# Altium PCB RelèBluetooth.PcbDoc
Units mil, origin at the board's own origin, x right, y up, seen from the top; angles counter-clockwise.
Board outline 2005 x 2655 mil, 2 copper layers (Top Layer, Bottom Layer); 26 components, 24 nets, 87 pads, 1 vias.
Unrouted connection lines stored in the file: 3.
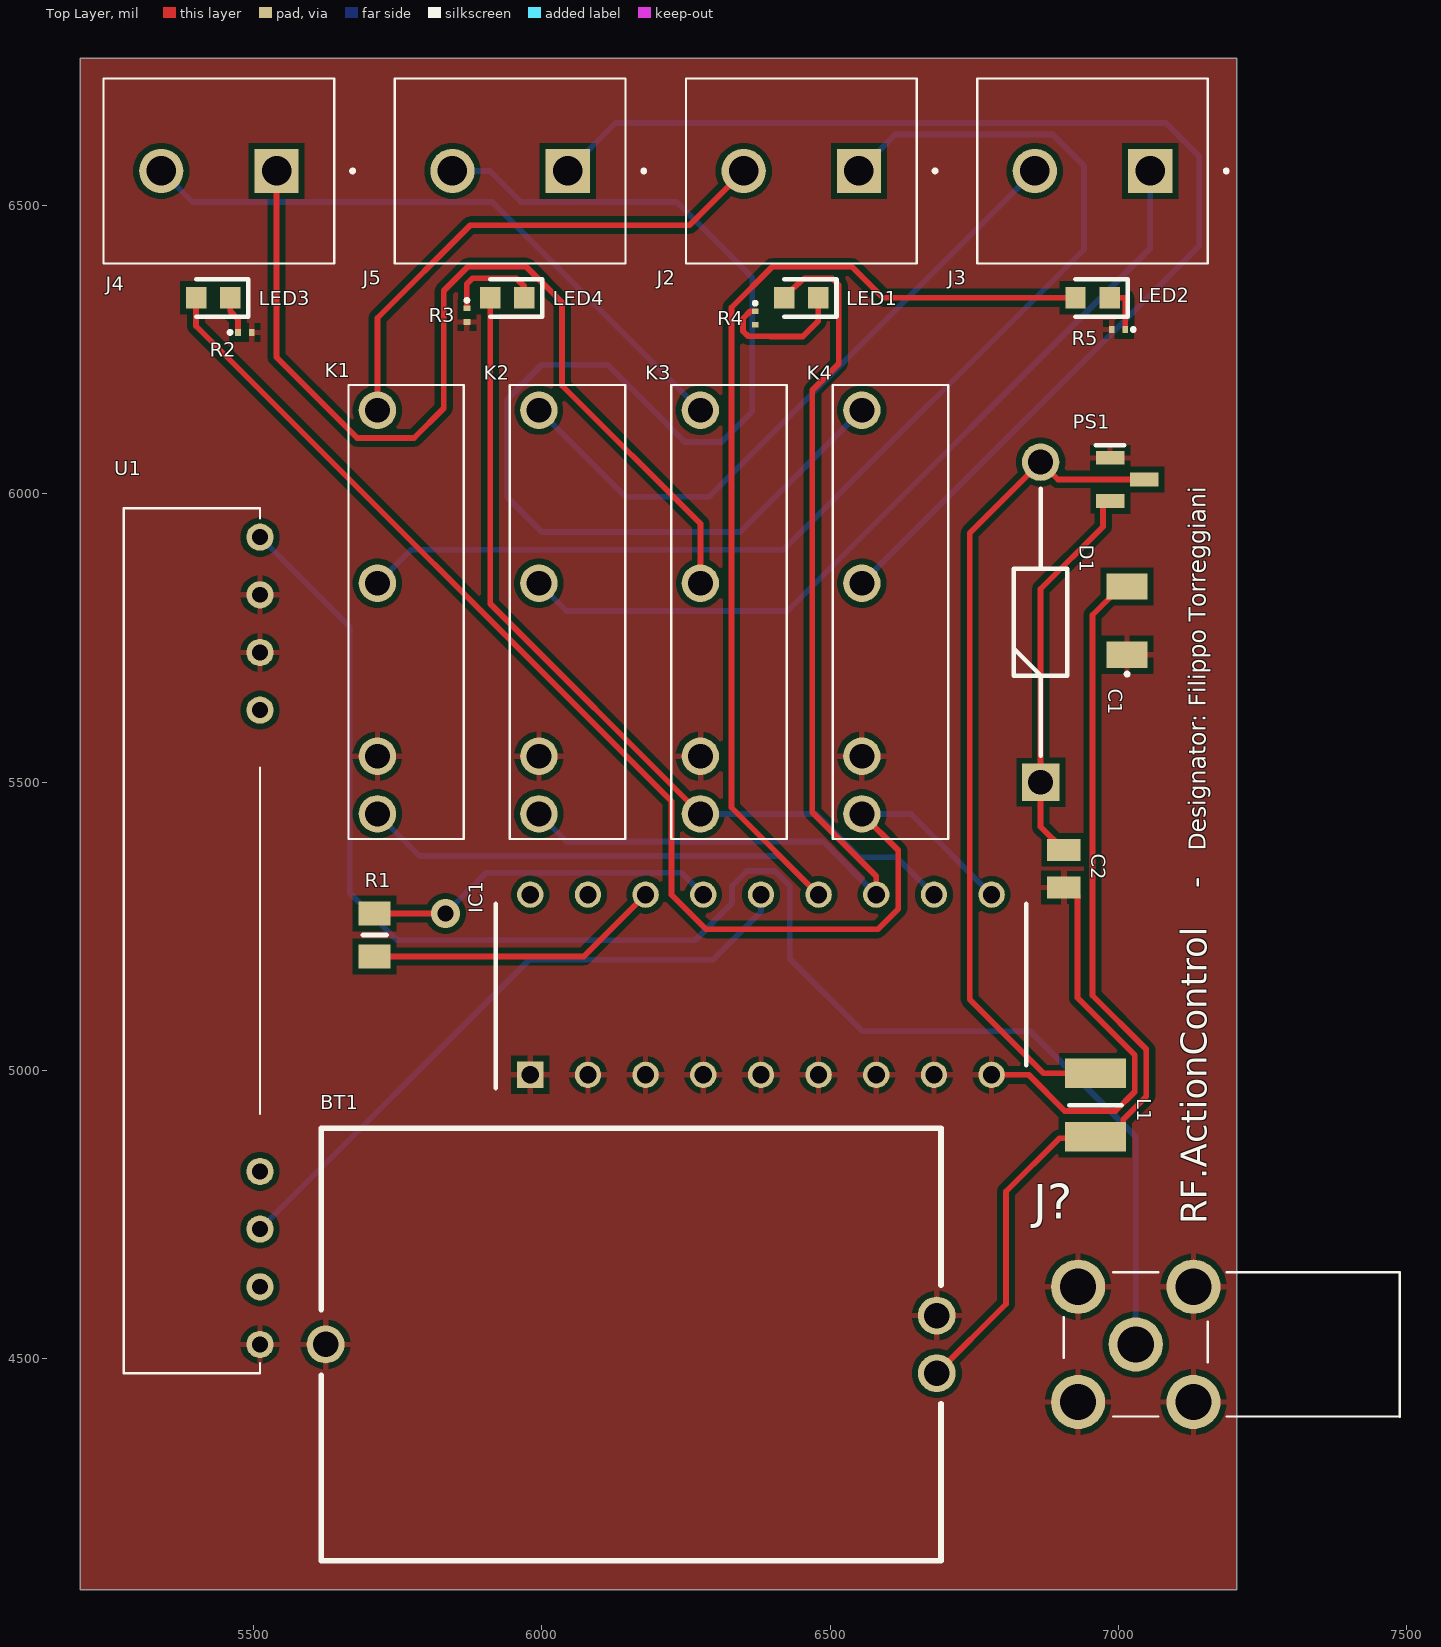
[diagram p0: Top Layer view]
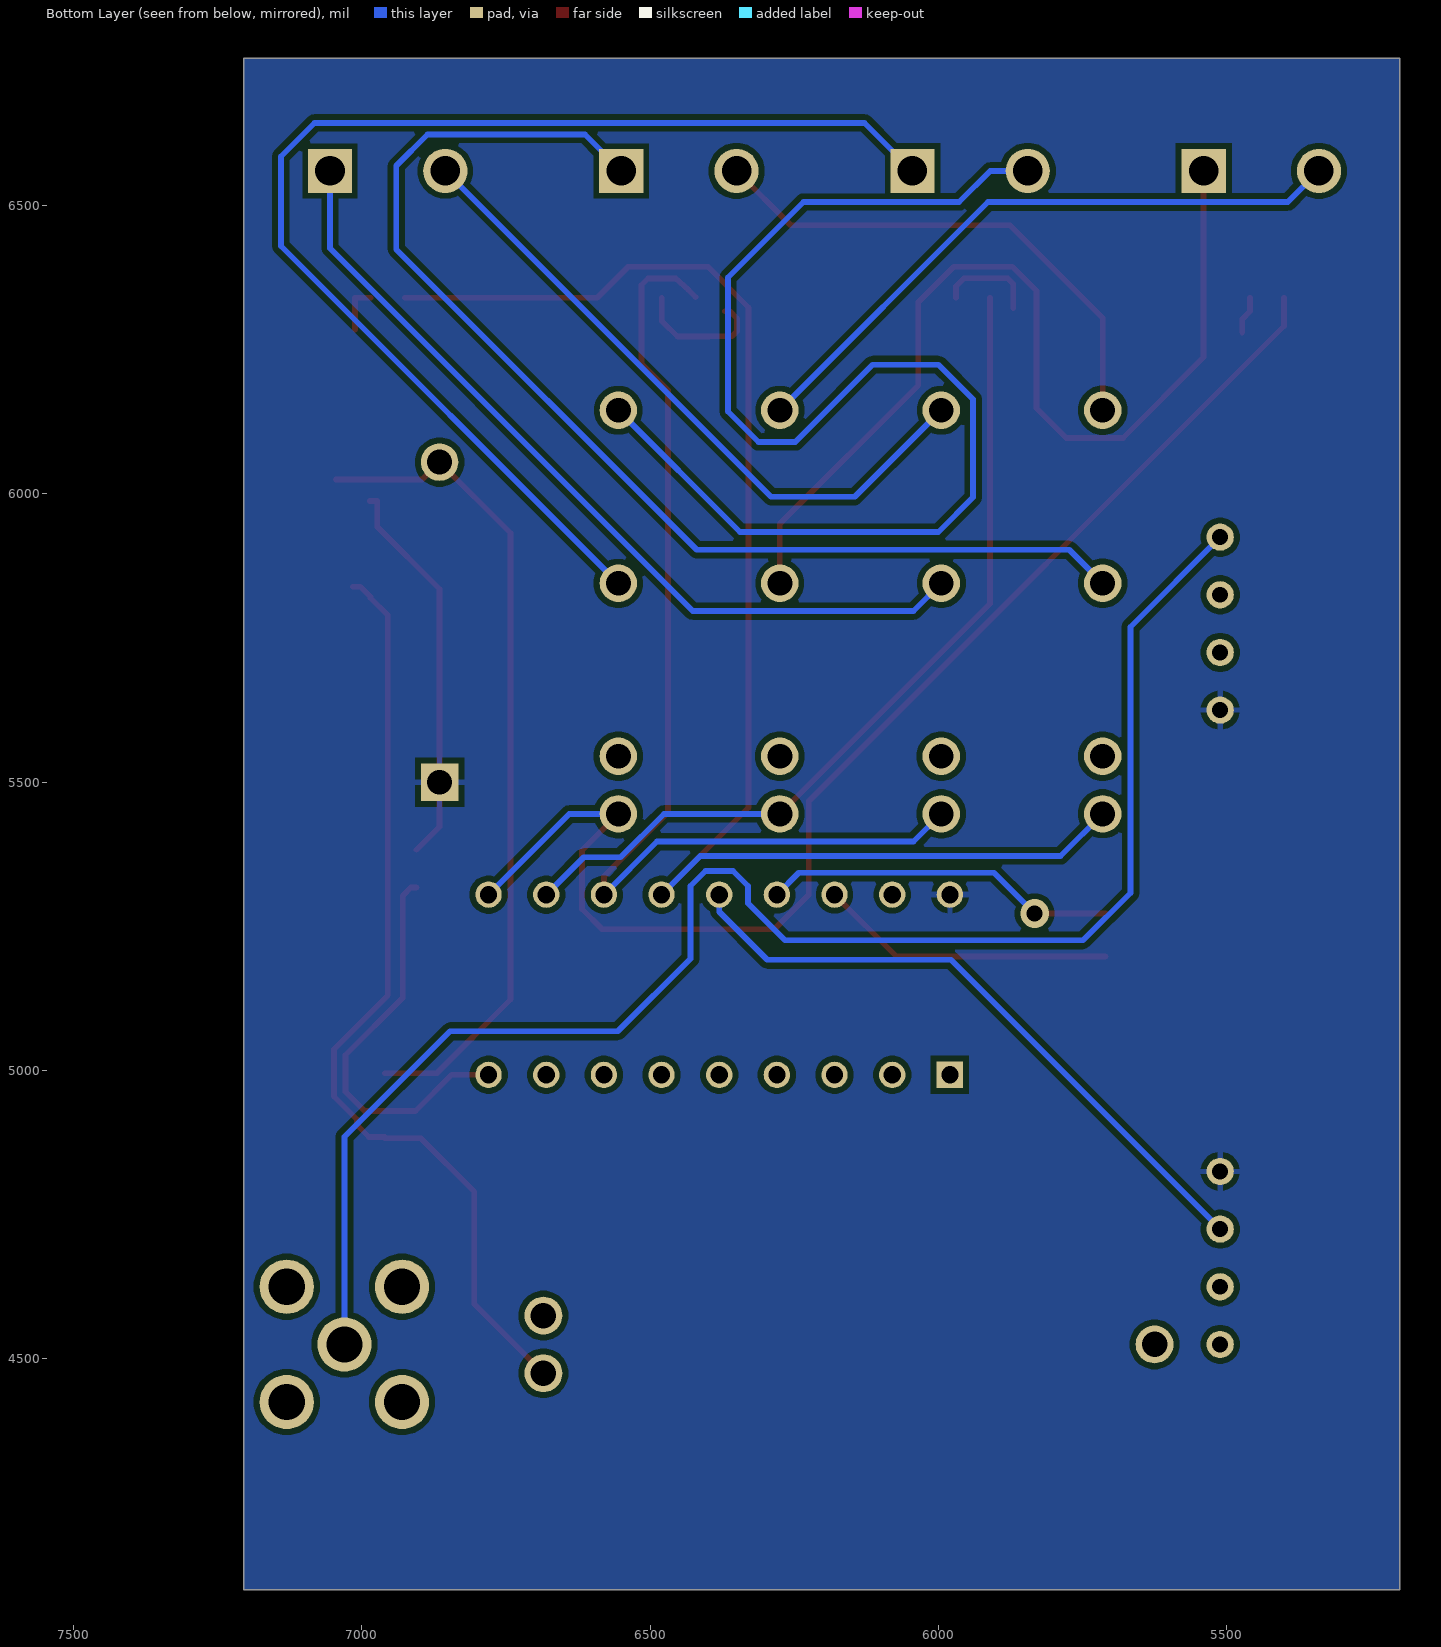
[diagram p1: Bottom Layer view, seen from below]
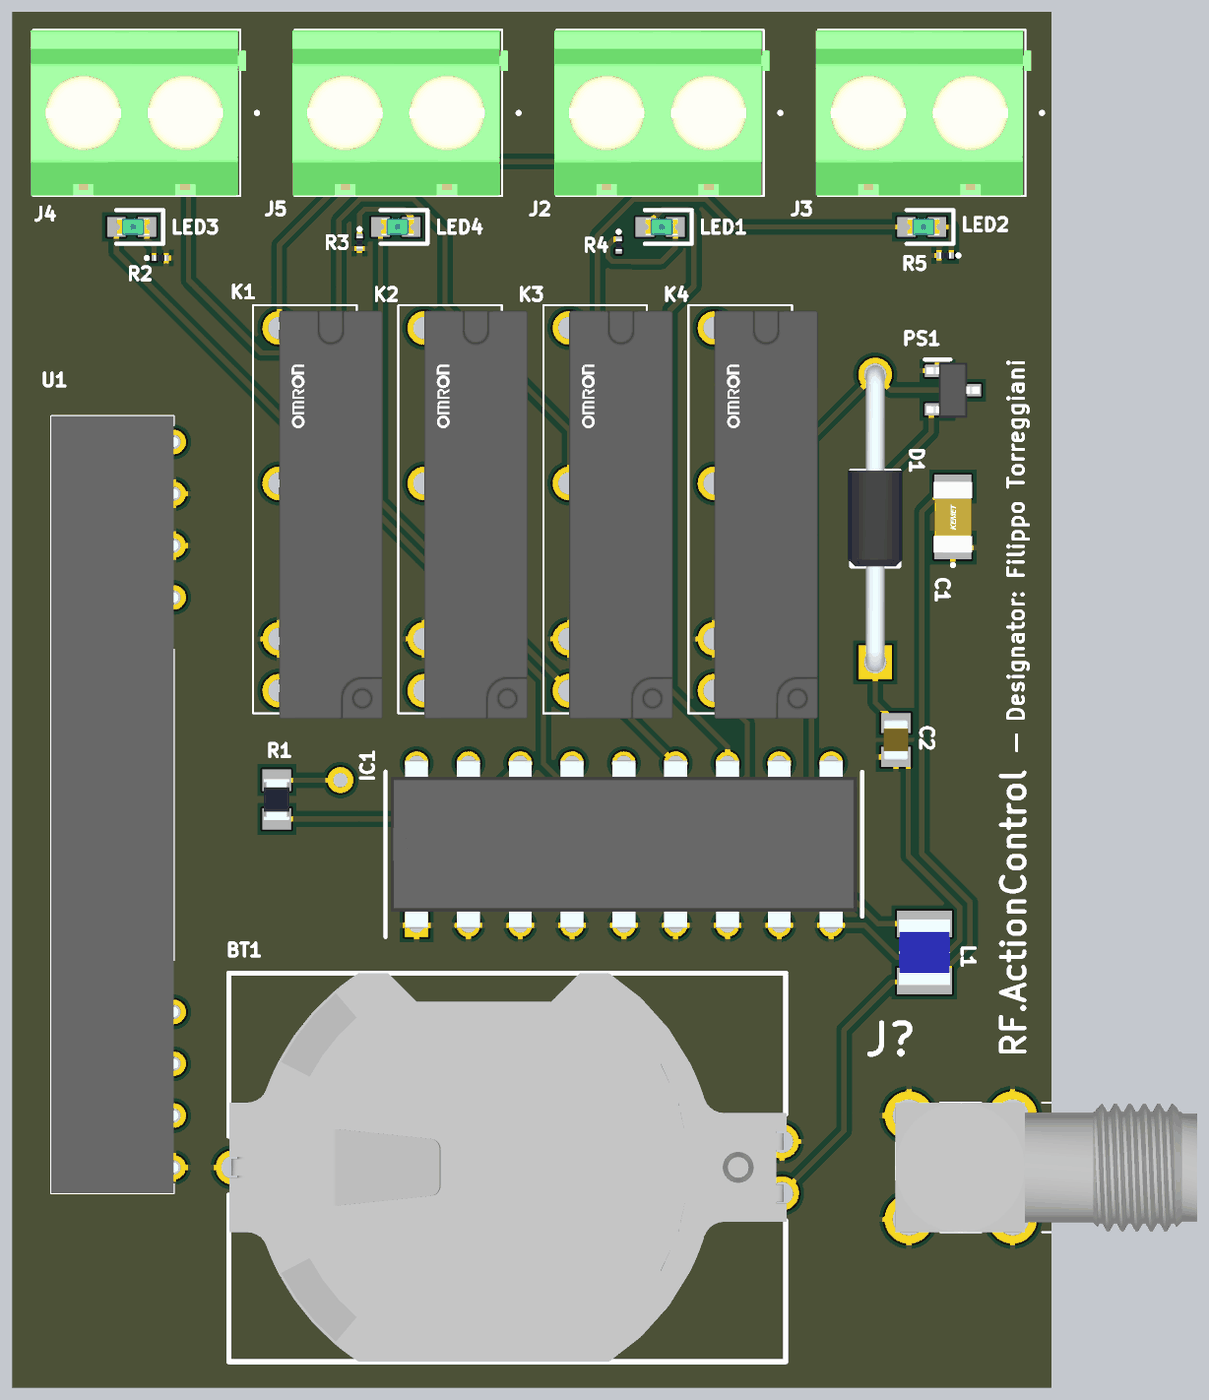
[diagram p2: 3D render of the assembled board from above, using the file's embedded part models]

## Layer stack, top to bottom
Top Solder: solder mask 0.4, Solder Resist, Dk 3.5
Top Layer: signal copper 1.4
Dielectric 1: dielectric 12.6, FR-4, Dk 4.8
Bottom Layer: signal copper 1.4
Bottom Solder: solder mask 0.4, Solder Resist, Dk 3.5

## Board outline
5200,4100 5200,6755 7205,6755 7205,4100

## Design rules (kind name [scope] priority, off if disabled: settings)
Clearance [All] p1: gap=10 ignorepadtopadclearanceinfootprint=FALSE
PolygonConnect [All] p1: connectstyle=Relief reliefconductorwidth=10 reliefentries=4 polygonreliefangle="90 Angle" airgapwidth=10
RoutingVias [All] p1: holewidth=28 width=50 viastyle="Through Hole" minholewidth=28 minwidth=50 maxholewidth=28 maxwidth=50
SolderMaskExpansion [All] p1: expansion=4 istentingtop=FALSE
Width [All] p1: maxlimit=10 minlimit=10 preferedwidth=10
30 further rules are at their usual default settings.

## Components (designator, comment, footprint, x,y, rotation, side; value= is the part's Value field where it differs from the comment)
BT1 "120591-1" 120591-1 6155,4525 r180 top locked
C1 "C1206C476M8PACTU" C1206 7015,5780 r90 top locked
C2 "GRM21BR60J226ME39L" CAPC2012X145N 6905,5350 r90 top locked
D1 "1N5817" DIOAD1410W90L470D235 6865,5499.88 r90 top locked
IC1 "HT12D" DIP794W56P254L2286H495Q18N 6380,5148.74 r90 top locked
J2 "1729128" 1729128 6550,6560 r180 top locked
J3 "1729128" 1729128 7055,6560 r180 top locked
J4 "1729128" 1729128 5540,6560 r180 top locked
J5 "1729128" 1729128 6045,6560 r180 top locked
J? "73100-0114" 731000114 7030,4525 r180 top
K1 "G6DN-1A-SL_DC5" G6DN1ASLDC5 5715,5445 r90 top locked
K2 "G6DN-1A-SL_DC5" G6DN1ASLDC5 5995,5445 r90 top locked
K3 "G6DN-1A-SL_DC5" G6DN1ASLDC5 6275,5445 r90 top locked
K4 "G6DN-1A-SL_DC5" G6DN1ASLDC5 6555,5445 r90 top locked
L1 "CBC3225T101MR" INDC3225X270N 6960,4940 r270 top locked
LED1 "LTST-C191TBKT" LEDC1608X65N 6450,6340 r180 top locked
LED2 "LTST-C191TBKT" LEDC1608X65N 6955,6340 r180 top locked
LED3 "LTST-C191TBKT" LEDC1608X65N 5430,6340 r180 top locked
LED4 "LTST-C191TBKT" LEDC1608X65N 5940,6340 r180 top locked
PS1 "HT7750A_SOT23-3" SOT95P190X145-3N 7015,6025 r0 top locked
R1 "ERJ-6GEYJ513V" RESC2012X70N 5710,5235 r90 top locked
R2 "ERJ-1GNF3300C" ERJ1GN_(0201) 5485,6280 r0 top locked
R3 "ERJ-1GNF3300C" ERJ1GN_(0201) 5870,6310 r270 top locked
R4 "ERJ-1GNF3300C" ERJ1GN_(0201) 6370,6305 r270 top locked
R5 "ERJ-1GNF3300C" ERJ1GN_(0201) 7000,6285 r180 top
U1 "AM-RX12A-433P" AMRX12A433P 5405,5225 r270 top locked

## Footprints (in the part's own frame and the unit in brackets; to place one, negate y for a bottom-side part, rotate by r counter-clockwise, add the part's x,y. Pads: shape width x height; smd on the part's side, far side on the other; paste and mask are expansions set on the pad)
120591-1 [mm]
  round 1.67 hole 1.12: 1(-13.46,1.27) 2(-13.46,-1.27) 3(13.46,0)
  silkscreen extent -13.65,-9.53 13.65,9.53, body extent -13.68,-9.53 13.62,9.53, height 6.32
1729128 [mm]
  rect 1.95x1.95 hole 1.3: 1(0,0)
  round 1.95 hole 1.3: 2(5.08,0)
  silkscreen extent -3.4,-4.08 7.62,4.08, body extent -2.82,-4.05 7.74,4.05, height 10.32
731000114 [mm]
  round 2.385 hole 1.59: 1(0,0) 2(-2.54,-2.54) 3(-2.54,2.54) 4(2.54,2.54) 5(2.54,-2.54)
  silkscreen extent -11.63,-3.18 3.17,3.2, body extent -11.6,-3.18 3.2,3.18, height 9.57
AMRX12A433P [mm]
  round 1.2 hole 0.7: 1(-17.78,2.7) 2(-15.24,2.7) 3(-12.7,2.7) 4(-10.16,2.7) 12(10.16,2.7) 13(12.7,2.7) 14(15.24,2.7) 15(17.78,2.7)
  silkscreen extent -19.05,-3.3 19.05,2.7, body extent -19.05,-3.3 19.05,2.95, height 14.1
C1206 [mm]
  rect 1.15x1.8 smd: 1(-1.5,0) 2(1.5,0)
  silkscreen extent -2.4,-0.05 -2.3,0.05, body extent -1.75,-0.95 1.75,0.95, height 1.8
CAPC2012X145N [mm]
  rect 0.97x1.47 smd: 1(-0.83,0) 2(0.83,0)
  body extent -1,-0.63 1,0.63, height 1.45
DIOAD1410W90L470D235 [mm]
  rect 1.65x1.65 hole 1.1: 1(0,0)
  round 1.65 hole 1.1: 2(14.1,0)
  silkscreen extent 1.18,-1.18 12.92,1.18, body extent -0.45,-1.34 14.55,1.34, height 2.7
DIP794W56P254L2286H495Q18N [mil]
  rect 45.63x45.63 hole 29.88: 1(-156.26,400)
  round 45.63 hole 29.88: 2(-156.26,300) 3(-156.26,200) 4(-156.26,100) 5(-156.26,0) 6(-156.26,-100) 7(-156.26,-200) 8(-156.26,-300) 9(-156.26,-400) 10(156.26,-400) 11(156.26,-300) 12(156.26,-200) 13(156.26,-100) 14(156.26,0) 15(156.26,100) 16(156.26,200) 17(156.26,300) 18(156.26,400)
  silkscreen extent -179,-460 140,460, body extent -162,-450 162,450, height 195
ERJ1GN_(0201) [mm]
  rect 0.25x0.3 smd: 1(-0.3,0) 2(0.3,0)
  silkscreen extent -0.7,-0.05 -0.6,0.05, body extent -0.3,-0.15 0.3,0.15, height 0.23
G6DN1ASLDC5 [mm]
  round 1.65 hole 1.1: 1(0,0) 2(2.54,0) 5(10.16,0) 8(17.78,0)
  silkscreen extent -1.11,-3.8 18.89,1.28, body extent -1.38,-5.07 18.62,0.01, height 15.74
INDC3225X270N [mm]
  rect 1.3x2.7 smd: 1(-1.4,0) 2(1.4,0)
  silkscreen extent 0,-1.15 0,1.15, body extent -1.6,-1.25 1.6,1.25, height 2.7
LEDC1608X65N [mm]
  rect 0.9x0.95 smd: 1(-0.75,0) 2(0.75,0)
  silkscreen extent -1.55,-0.82 0.75,0.82, body extent -0.88,-0.4 0.72,0.4, height 0.65
RESC2012X70N [mm]
  rect 1.05x1.4 smd: 1(-0.95,0) 2(0.95,0)
  silkscreen extent 0,-0.53 0,0.53, body extent -1,-0.63 1,0.63, height 0.6
SOT95P190X145-3N [mm]
  rect 1.25x0.6 smd: 1(-0.75,0.95) 2(-0.75,-0.95) 3(0.75,0)
  silkscreen extent -1.38,1.5 -0.13,1.5, body extent -1.3,-1.35 1.3,1.35, height 1.1

## Part data
BT1: "Battery", Manufacturer_Name="TE Connectivity", Mouser Part Number=571-1205911, Arrow Part Number=120591-1, Arrow Price/Stock=https://www.arrow.com/en/products/120591-1/te-connectivity?region=nac, Datasheet Link=http://www.te.com/commerce/DocumentDelivery/DDEController?Action=srchrtrv&DocNm=120591&DocType=Customer+Drawing&DocLang=English&DocFormat=pdf&PartCntxt=120591-1, Manufacturer_Part_Number=120591-1, Mouser Price/Stock=https://www.mouser.co.uk/ProductDetail/TE-Connectivity/120591-1?qs=cB%252BprIo57OeZ1n1mnEiYEw%3D%3D
C1: "Capacitor", Manufacturer_Name=KEMET, Mouser Part Number=80-C1206C476M8P, Arrow Part Number=C1206C476M8PACTU, Arrow Price/Stock=https://www.arrow.com/en/products/c1206c476m8pactu/kemet-corporation, Datasheet Link=https://content.kemet.com/datasheets/KEM_C1006_X5R_SMD.pdf, Manufacturer_Part_Number=C1206C476M8PACTU, Mouser Price/Stock=https://www.mouser.co.uk/ProductDetail/KEMET/C1206C476M8PACTU?qs=K%2Fj%2Fqf%252B0fqIWQ8LQ8mLiKw%3D%3D
C2: "Capacitor", Manufacturer_Name="Murata Electronics", Mouser Part Number=81-GRM21R60J226ME39L, Arrow Part Number=GRM21BR60J226ME39L, Arrow Price/Stock=https://www.arrow.com/en/products/grm21br60j226me39l/murata-manufacturing?region=nac, Datasheet Link=http://www.murata.com/~/media/webrenewal/support/library/catalog/products/capacitor/mlcc/c02e.pdf, Height=1.45mm, Manufacturer_Part_Number=GRM21BR60J226ME39L, Mouser Price/Stock=https://www.mouser.co.uk/ProductDetail/Murata-Electronics/GRM21BR60J226ME39L?qs=DJY02EClX9n4vY1%2FNV53Qw%3D%3D
D1: "Schottky Diode", Manufacturer_Name=Rectron, Arrow Part Number=1N5817, Arrow Price/Stock=https://www.arrow.com/en/products/1n5817/rectron?region=nac, Datasheet Link=https://www.arrow.com/en/products/1n5817/rectron, Manufacturer_Part_Number=1N5817
IC1: "Integrated Circuit", Manufacturer_Name=Holtek, Datasheet Link=https://datasheet.datasheetarchive.com/originals/distributors/Datasheets-28/DSA-559636.pdf, Height=4.953mm, Manufacturer_Part_Number=HT12D
J2 J3 J4 J5: "Connector", Manufacturer_Name="Phoenix Contact", Mouser Part Number=651-1729128, Arrow Part Number=1729128, Arrow Price/Stock=https://www.arrow.com/en/products/1729128/phoenix-contact?region=nac, Datasheet Link=http://www.phoenixcontact.net/product/1729128, Height=10.15mm, Manufacturer_Part_Number=1729128, Mouser Price/Stock=https://www.mouser.co.uk/ProductDetail/Phoenix-Contact/1729128?qs=GFUSqQMLmmnCBVBY3dts9w%3D%3D
J?: "Connector", Manufacturer_Name=Molex, Mouser Part Number=538-73100-0114, Arrow Part Number=73100-0114, Arrow Price/Stock=https://www.arrow.com/en/products/73100-0114/molex?region=nac, Datasheet Link=https://www.molex.com/pdm_docs/sd/731000114_sd.pdf, Height=9.57mm, Manufacturer_Part_Number=73100-0114, Mouser Price/Stock=https://www.mouser.co.uk/ProductDetail/Molex/73100-0114?qs=ohtcwxb5zIvxHEM9IPQ5cQ%3D%3D
K1 K2 K3 K4: "Relay or Contactor", Arrow Part Number="G6DN-1A-SL DC5", Manufacturer_Name="Omron Electronics", Mouser Part Number=653-G6DN-1A-SL-DC5, Arrow Price/Stock=https://www.arrow.com/en/products/g6dn-1a-sl-dc5/omron?region=nac, Datasheet Link=https://datasheet.lcsc.com/szlcsc/1909171832_Omron-Electronics-G6DN-1A-SL-DC5_C397208.pdf, Height=12.5mm, Manufacturer_Part_Number="G6DN-1A-SL DC5", Mouser Price/Stock=https://www.mouser.co.uk/ProductDetail/Omron-Electronics/G6DN-1A-SL-DC5?qs=Cb2nCFKsA8rQaEt13kEruA%3D%3D
L1: "Inductor", Manufacturer_Name="TAIYO YUDEN", Mouser Part Number=963-CBC3225T101MR, Arrow Part Number=CBC3225T101MR, Arrow Price/Stock=https://www.arrow.com/en/products/cbc3225t101mr/taiyo-yuden, Datasheet Link=https://componentsearchengine.com/Datasheets/2/CBC3225T101MR.pdf, Height=2.7mm, Manufacturer_Part_Number=CBC3225T101MR, Mouser Price/Stock=https://www.mouser.co.uk/ProductDetail/TAIYO-YUDEN/CBC3225T101MR?qs=I6KAKw0tg2wCaeirMPJHXw%3D%3D
LED1 LED2 LED3 LED4: "LED", Manufacturer_Name=Lite-On, Mouser Part Number=859-LTST-C191TBKT, Arrow Part Number=LTST-C191TBKT, Arrow Price/Stock=https://www.arrow.com/en/products/ltst-c191tbkt/lite-on-technology?region=nac, Datasheet Link=http://optoelectronics.liteon.com/upload/download/DS22-2000-230/LTST-C191TBKT.pdf, Height=0.65mm, Manufacturer_Part_Number=LTST-C191TBKT, Mouser Price/Stock=https://www.mouser.co.uk/ProductDetail/Lite-On/LTST-C191TBKT?qs=dmW16TmpDgF%252B6HWuTmCtcw%3D%3D
PS1: "Power Supply", Manufacturer_Name=Holtek, Manufacturer_Part_Number="HT7750A SOT23-3", Height=1.45mm
R1: "Resistor", Manufacturer_Name=Panasonic, Mouser Part Number=667-ERJ-6GEYJ513V, Arrow Part Number=ERJ-6GEYJ513V, Arrow Price/Stock=https://www.arrow.com/en/products/erj-6geyj513v/panasonic, Datasheet Link=https://datasheet.datasheetarchive.com/originals/distributors/DKDS40/DSANUWW0011030.pdf, Height=0.7mm, Manufacturer_Part_Number=ERJ-6GEYJ513V, Mouser Price/Stock=https://www.mouser.com/Search/Refine.aspx?Keyword=667-ERJ-6GEYJ513V
R2 R3 R4 R5: "Resistor", Manufacturer_Name=Panasonic, Mouser Part Number=667-ERJ-1GNF3300C, Arrow Part Number=ERJ-1GNF3300C, Arrow Price/Stock=https://www.arrow.com/en/products/erj-1gnf3300c/panasonic, Datasheet Link=https://industrial.panasonic.com/cdbs/www-data/pdf/RDA0000/AOA0000C301.pdf, Height=0.26mm, Manufacturer_Part_Number=ERJ-1GNF3300C, Mouser Price/Stock=https://www.mouser.co.uk/ProductDetail/Panasonic/ERJ-1GNF3300C?qs=nuXzIS8loXGdtA3emz%252Bc%252Bg%3D%3D
U1: "Undefined or Miscellaneous", Manufacturer_Name="RF SOLUTIONS", Mouser Part Number=223-AM-RX12A-433P, Arrow Part Number=AM-RX12A-433P, Arrow Price/Stock=https://www.arrow.com/en/products/am-rx12a-433p/rf-solutions, Datasheet Link=https://datasheet.datasheetarchive.com/originals/distributors/DKDS-5/87927.pdf, Height=14mm, Manufacturer_Part_Number=AM-RX12A-433P, Mouser Price/Stock=https://www.mouser.co.uk/ProductDetail/RF-Solutions/AM-RX12A-433P?qs=OlC7AqGiEDnLHUSop2Y94Q%3D%3D

## Via types
v1: diameter 50, hole 28, Top Layer to Bottom Layer, 1 vias

## Nets (pads, with @x,y where several pads share a name; then routed paths per layer and width w, separated by ;. In a path a pad name is that pad's centre, name@x,y a point inside that pad or via, vN(x,y) a via of type N, cw(c..) or ccw(c..) an arc to the next point about the centre after c; other vN are vias at no path point)
1IN: J2.1 K1.5 | length 2048.3
  Bottom Layer w10: K1.5 5773,5903 6419,5903 6940,6424 6940,6569 6886,6623 6613,6623 J2.1
1OUT: J2.2 K1.8 | length 900.6
  Top Layer w10: K1.8 5715,6305 5876,6466 6256,6466 J2.2
2IN: J3.1 K2.5 | length 1474.4
  Bottom Layer w10: K2.5 6043,5797 6426,5797 7055,6426 J3.1
2OUT: J3.2 K2.8 | length 1156.2
  Bottom Layer w10: K2.8 6145,5995 6290,5995 J3.2
3IN: J4.1 K3.5 | length 1730.6
  Top Layer w10: J4.1 5540,6237 5680,6097 5778.37,6097 5830,6148.63 5830,6352.41 5871.59,6394 5973.16,6394 6035,6332.16 6035,6188 6275,5948 K3.5
3OUT: J4.2 K3.8 | length 1106.9
  Bottom Layer w10: J4.2 5394,6506 5914,6506 K3.8
4IN: J5.1 K4.5 | length 2135.7
  Bottom Layer w10: J5.1 6128,6643 7082,6643 7140,6585 7140,6430 K4.5
4OUT: J5.2 K4.8 | length 2253.2
  Bottom Layer w10: J5.2 5910,6560 5964,6506 6234,6506 6365,6375 6365,6143 6312,6090 6248,6090 6114,6224 6000,6224 5940,6164 5940,5994 6000,5934 6344,5934 K4.8
+3.7/4V: BT1.1 C1.2 L1.2 | length 1635.9
  Top Layer w10: BT1.1 6805,4595.08 6805,4790 6897.71,4882.71 L1.2@6960,4882.71 ; L1.2 6987.56,4884.88 7008.15,4905.47 7008.15,4915.03 7048.15,4955.03 7048.15,5036.85 6955,5130 6955,5790 6984.57,5819.57 6984.57,5821.42 7002.2,5839.06 C1.2
+5: C2.2 D1.1 IC1.18 PS1.2 U1.4 U1.12 | length 678.7
  Top Layer w10: C2.2 6865,5422.68 D1.1 6865,5835 6973,5943 6973,5987.6 PS1.2
C1: IC1.13 K1.1 LED2.2 | length 2551.5
  Top Layer w10: IC1.13 6329.09,5455.91 6329.09,6323.09 6399.7,6393.7 6537.96,6393.7 6591.66,6340 LED2.2
  Bottom Layer w10: K1.1 5788,5372 6413,5372 IC1.13
C2: IC1.12 K2.1 LED1.2 | length 1876.6
  Top Layer w10: LED1.2@6421,6341.51 6433.19,6353.7 6455.57,6373.68 ; 6455.6,6373.7 6503.46,6373.7 6515,6362.16 6515,6225.75 6469,6179.75 6469,5448 6580,5337 IC1.12
  Bottom Layer w10: K2.1 6043,5397 6488,5397 IC1.12
C3: IC1.11 K3.1 LED4.2 | length 1509
  Top Layer w10: LED4.2 5910.47,5809.53 K3.1
  Bottom Layer w10: K3.1 6476,5445 6551,5370 6615,5370 IC1.11
C4: IC1.10 K4.1 LED3.2 | length 2283.1
  Top Layer w10: LED3.2 5400.47,6291.24 6224.79,5466.93 6224.79,5305 6284.79,5245 6583,5245 6618,5280 6618,5382 K4.1
  Bottom Layer w10: K4.1 6640,5445 IC1.10
DATA_OUTPUT: IC1.14 U1.13 | length 1126.3
  Bottom Layer w10: U1.13 5978.3,5192 6296.67,5192 6380,5275.33 IC1.14
GND: BT1.2 BT1.3 C1.1 C2.1 IC1.1 IC1.2 IC1.3 IC1.4 IC1.5 IC1.6 IC1.7 IC1.8 IC1.9 J?.2 J?.3 J?.4 J?.5 K1.2 K2.2 K3.2 K4.2 PS1.1 R2.2 R3.2 R4.2 R5.2 U1.2 U1.3 U1.15 | length 698.6
  Top Layer w10: IC1.9 6844.35,4992.48 6906.83,4930 6994.84,4930 7028.15,4963.31 7028.15,5026.92 6928.94,5126.13 6928.94,5303.23 6914.84,5317.32 C2.1
NetD1_2: D1.2 L1.1 PS1.3 | length 1445.8
  Top Layer w10: L1.1 6870,4995.12 6742,5123.12 6742,5932 D1.2 6895,6025 PS1.3
NetIC1_15: IC1.15 R1.2 | length 615
  Top Layer w10: R1.2 v1(5833,5272.4)
  Bottom Layer w10: v1(5833,5272.4) 5903.6,5343 6242,5343 IC1.15
NetIC1_16: IC1.16 R1.1 | length 514.5
  Top Layer w10: R1.1 6072.6,5197.6 IC1.16
NetLED1_1: LED1.1 R4.1 | length 233.6
  Top Layer w10: R4.1 6361.58,6316.81 6349.09,6304.32 6349.09,6282.06 6357.88,6273.27 6394.93,6273.27 6396.72,6273 6452.53,6273 6479.53,6300 LED1.1
NetLED2_1: LED2.1 R5.1 | length 82.3
  Top Layer w10: LED2.1 7011.81,6340 R5.1
NetLED3_1: LED3.1 R2.1 | length 65.7
  Top Layer w10: LED3.1 5459.53,6316.66 5473.19,6303 R2.1
NetLED4_1: LED4.1 R3.1 | length 171.7
  Top Layer w10: R3.1 5870,6364.12 5879.88,6374 5955.53,6374 5969.53,6360 LED4.1
RF_Connector: J?.1 U1.1 | length 2770.5
  Bottom Layer w10: U1.1 5667,5769.3 5667,5308 5749,5226 6266,5226 6330,5290 6330,5320 6356,5346 6404,5346 6430,5320 6430,5194 6556,5068 6847,5068 7030,4885 J?.1
pads on no net: IC1.17 U1.14

## Polygon pours and split planes (outlines as drawn)
+5 on Bottom Layer "+5_L02_P001" (solid, pour order 1): 5200,6755 7205,6755 7205,4100 5200,4100
GND on Top Layer "GND_L01_P000" (solid, pour order 0): 5200,6755 7205,6755 7205,4100 5200,4100

## Silkscreen, mask and mechanical layers (free items; w line width, h text height)
Top Overlay:
  text "Designator: Filippo Torreggiani" at 7150.99,5381 h30 r90
  text "-" at 7153.14,5316 h40 r90
  text "RF.ActionControl" at 7152.99,4733 h45 r90